# EAGLE board Phineas-PCB (EAGLE 9.6.1)

Size 130 x 131.91 mm. Coordinates in mm from the lower left corner, seen from the top.
Outline: 0,0 130,0 130,131.91 0,131.91 0,0
Copper layers (1*16): Top 0.035mm / dielectric 1.5mm / Bottom 0.035mm
Design rules "default": minimum track width 6mil, minimum drill 0.35mm, track to track 6mil, track to pad 6mil, pad to pad 6mil, via to via 6mil, smd to smd 6mil, copper to edge 40mil, drill to drill 6mil, minimum pad ring 10mil, minimum via ring 8mil, stop-mask expansion 4mil, vias tented up to drill 0mil, thermal gap 10mil

## Footprints (pad centres in the part's own frame; a part is rotated, then mirrored left to right if it is on the bottom)
ARDUINO_NANO = drill 0.8 square: 1 -20.32,-7.62 | drill 0.8: 2 -17.78,-7.62; 3 -15.24,-7.62; 4 -12.7,-7.62; 5 -10.16,-7.62; 6 -7.62,-7.62; 7 -5.08,-7.62; 8 -2.54,-7.62; 9 0,-7.62; 10 2.54,-7.62; 11 5.08,-7.62; 12 7.62,-7.62; 13 10.16,-7.62; 14 12.7,-7.62; 15 15.24,-7.62; 16 15.24,7.62; 17 12.7,7.62; 18 10.16,7.62; 19 7.62,7.62; 20 5.08,7.62; 21 2.54,7.62; 22 0,7.62; 23 -2.54,7.62; 24 -5.08,7.62; 25 -7.62,7.62; 26 -10.16,7.62; 27 -12.7,7.62; 28 -15.24,7.62; 29 -17.78,7.62; 30 -20.32,7.62 | hole 1.778: -22.86,-7.62; -22.86,7.62; 17.78,7.62; 17.78,-7.62
F/EE21P = drill 1.321 pad 2.54 octagon: 1 -5.004,0; 2 5.004,0
B3F-10XX = drill 1.016 long: 1 -3.251,2.261; 2 3.251,2.261; 3 -3.251,-2.261; 4 3.251,-2.261
TUXGR_16X2_R2 = drill 1 pad 1.676: 1 -32,15.5; 2 -29.46,15.5; 3 -26.92,15.5; 4 -24.38,15.5; 5 -21.84,15.5; 6 -19.3,15.5; 7 -16.76,15.5; 8 -14.22,15.5; 9 -11.68,15.5; 10 -9.14,15.5; 11 -6.6,15.5; 12 -4.06,15.5; 13 -1.52,15.5; 14 1.02,15.5; 15 3.56,15.5; 16 6.1,15.5 | hole 2.5: -37.5,-15.5; 37.5,-15.5; -37.5,15.5; 37.5,15.5
0204/7 = drill 0.813 octagon: 1 -3.81,0; 2 3.81,0
CIP20C-6MM = drill 1.3 pad 1.93: A -5,0; E 5,0; S 0,0

## Placement (x,y rotation side)
ARDUINO_NANO1  [ARDUINO_NANO]  97.14,104.59 180 top
BUZZER  F/EE21P  [F/EE21P]  33.5,104.14 0 top
DESCER  [B3F-10XX]  84.78,12.74 0 top
DIS1  TUXGR_16X2_R2  [TUXGR_16X2_R2]  63.5,62.23 0 top
PULAR  [B3F-10XX]  41.45,13.14 0 top
R1  [0204/7]  15.57,76.68 0 top
R2  [0204/7]  15.57,70.33 0 top
R3  [0204/7]  15.57,62.71 0 top
R4  [0204/7]  15.86,48.9 90 top
R5  [CIP20C-6MM]  119.38,63.5 90 top
RESET  [B3F-10XX]  101.07,32.4 0 top

## Library data of the parts
ARDUINO_NANO1 = ArduinoNanoV30
BUZZER = buzzer; OC_FARNELL: unknown; OC_NEWARK: unknown
DESCER PULAR RESET = switch-omron; MPN: B3F-1000; OC_FARNELL: 176432; OC_NEWARK: 36M3542
DIS1 = display-lcd; OC_FARNELL: unknown; OC_NEWARK: unknown
R1-R4 = rcl; SPICEPREFIX: R
R5 = pot

## Nets
GND: ARDUINO_NANO1.14 ARDUINO_NANO1.19 BUZZER.1 DIS1.1 R1.1 R2.1 R3.1 R4.1
N$2: PULAR.4 R1.2
N$3: DESCER.4 R2.2
N$4: R3.2 RESET.4
N$5: ARDUINO_NANO1.26 DIS1.4
N$6: ARDUINO_NANO1.30 RESET.3
N$7: ARDUINO_NANO1.29 DESCER.3
N$8: ARDUINO_NANO1.28 PULAR.3
N$9: ARDUINO_NANO1.27 DIS1.6
N$11: ARDUINO_NANO1.25 DIS1.14
N$12: ARDUINO_NANO1.24 DIS1.13
N$13: ARDUINO_NANO1.23 DIS1.12
N$14: ARDUINO_NANO1.22 DIS1.11
N$16: BUZZER.2 R5.E
N$18: ARDUINO_NANO1.21 R5.S
VCC: ARDUINO_NANO1.12 DESCER.2 DIS1.2 PULAR.2 RESET.2
VIN: ARDUINO_NANO1.15

## Tracks (layer width: path | path; a pad name or v marks a point on that pad's centre or on a via)
GND  (7 unrouted)
N$2  (1 unrouted)
N$3  (1 unrouted)
N$4  (1 unrouted)
N$5  (1 unrouted)
N$6  (1 unrouted)
N$7  (1 unrouted)
N$8  (1 unrouted)
N$9  (1 unrouted)
N$11  (1 unrouted)
N$12  (1 unrouted)
N$13  (1 unrouted)
N$14  (1 unrouted)
N$16  (1 unrouted)
N$18  (1 unrouted)
VCC  (4 unrouted)